# Altium PCB 控制板PCB.PcbDoc
Units mil, origin at the board's own origin, x right, y up, seen from the top; angles counter-clockwise.
Board outline 3952.04 x 3955.04 mil, 2 copper layers (Top Layer, Bottom Layer); 17 components, 47 nets, 230 pads, 243 vias.
Unrouted connection lines stored in the file: 41.
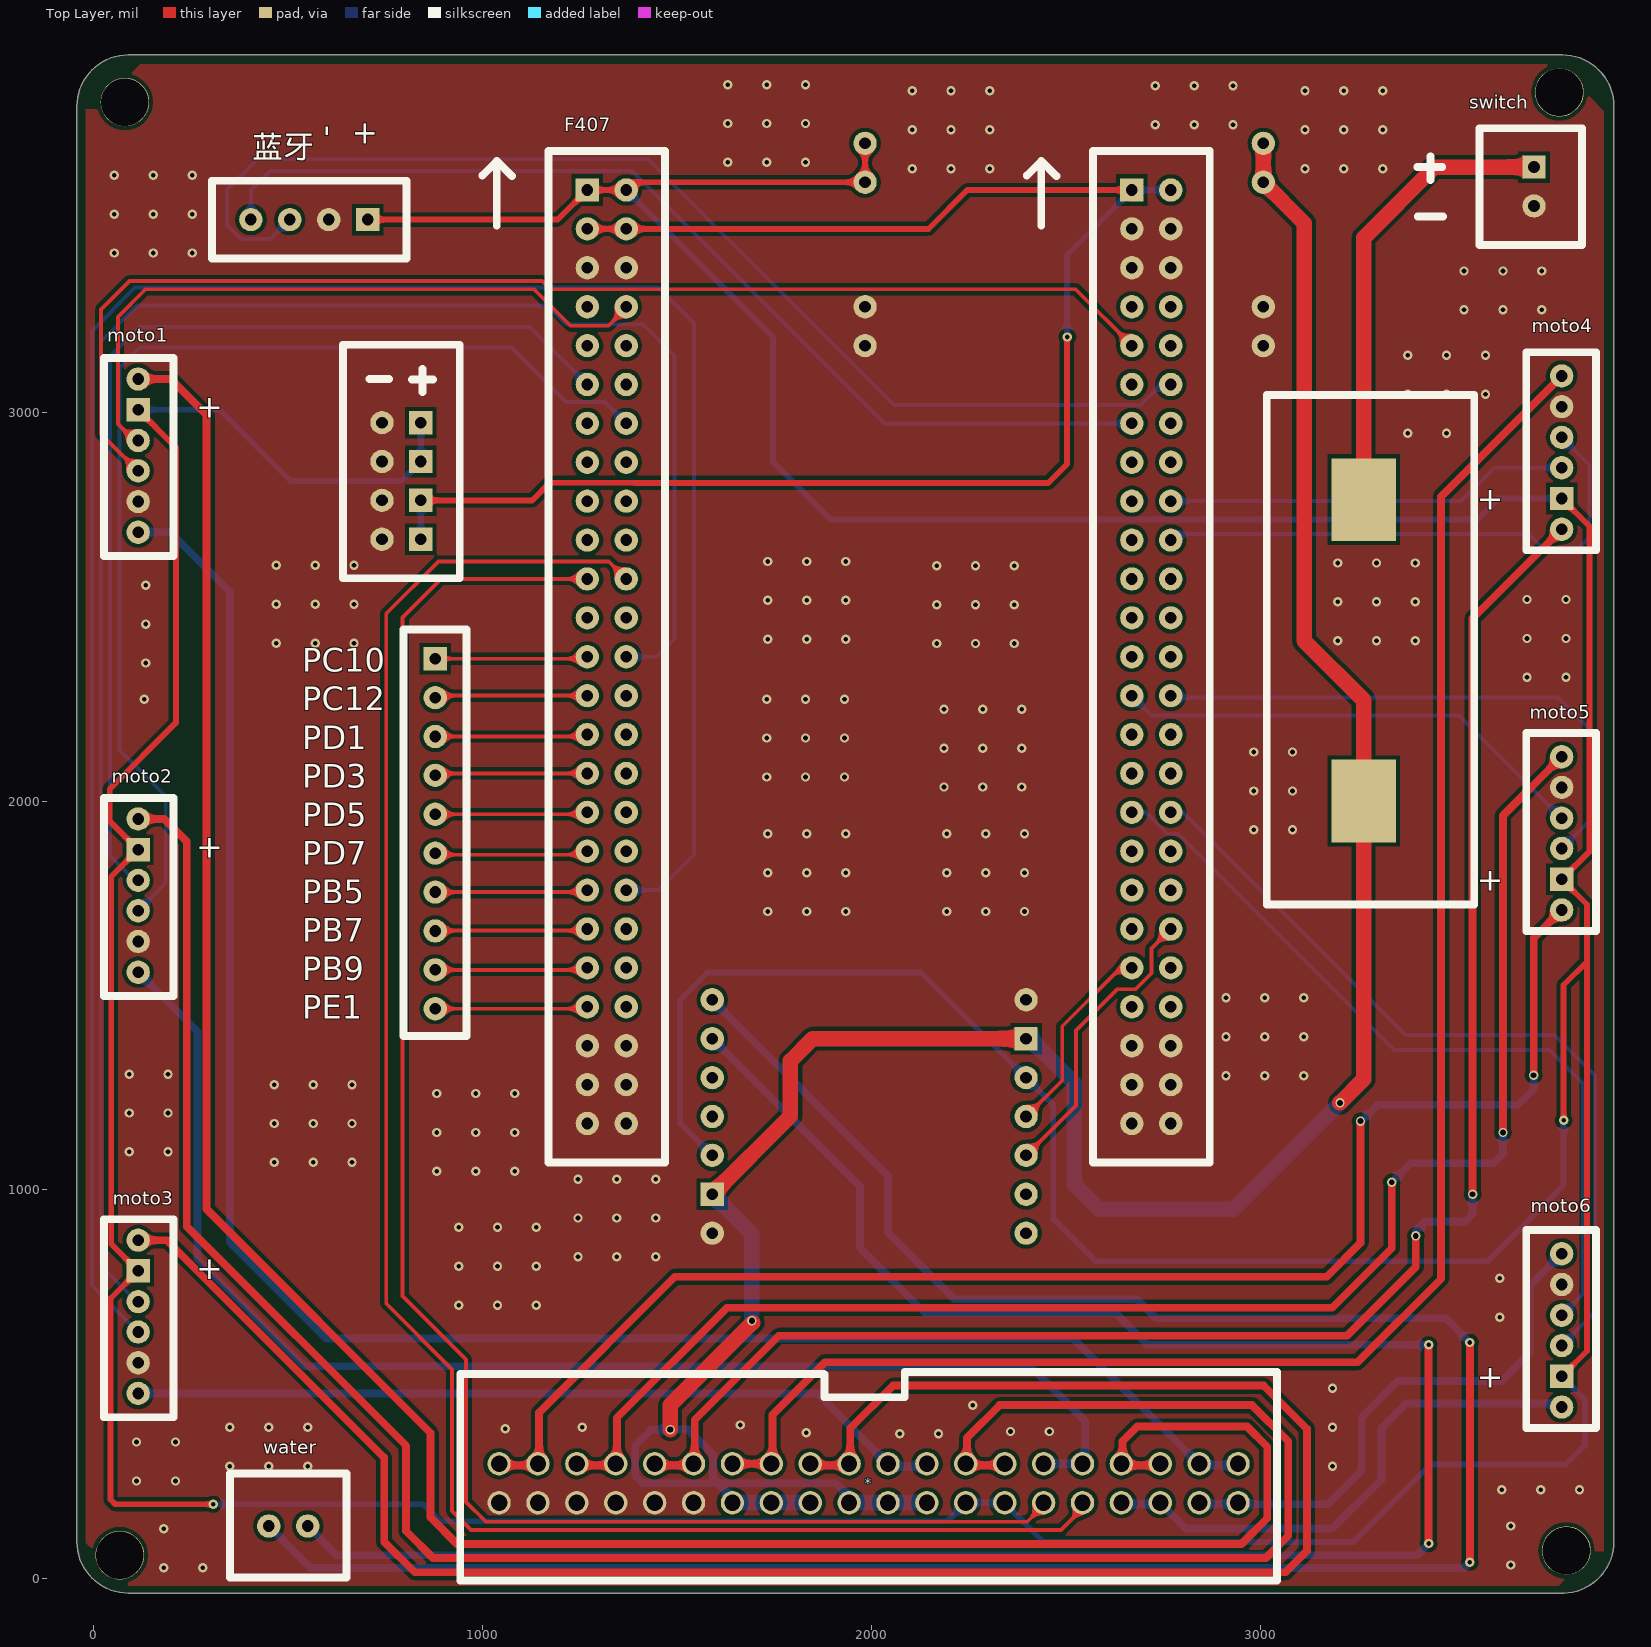
[diagram p0: Top Layer view]
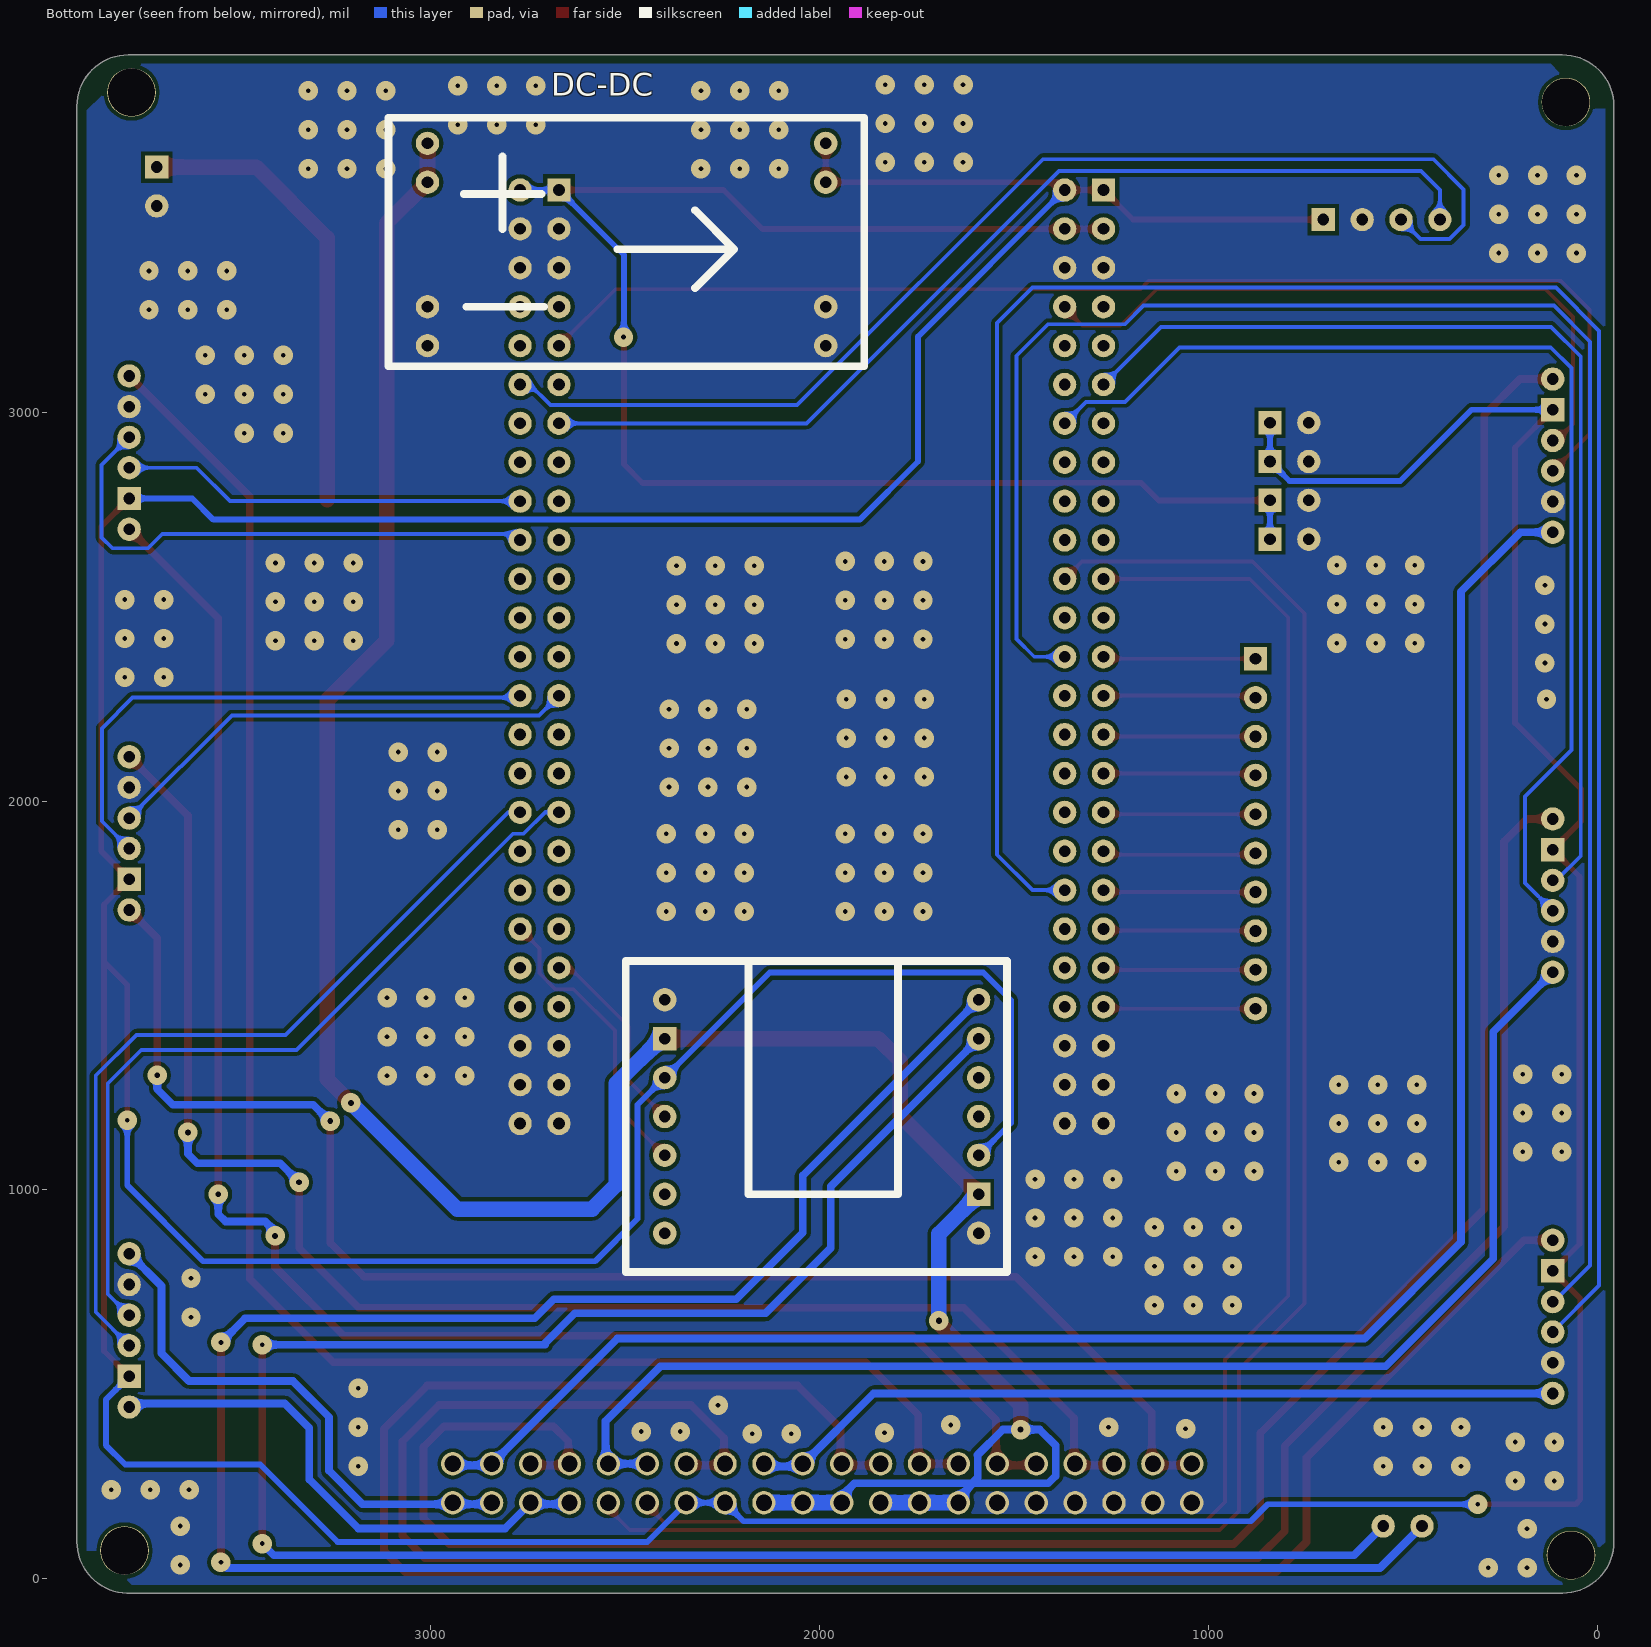
[diagram p1: Bottom Layer view, seen from below]

## Layer stack, top to bottom
Top Solder: solder mask 0.4, Solder Resist, Dk 3.5
Top Layer: signal copper 1.4
Dielectric 1: dielectric 12.6, FR-4, Dk 4.8
Bottom Layer: signal copper 1.4
Bottom Solder: solder mask 0.4, Solder Resist, Dk 3.5

## Board outline
89.24,-36.52 cw(c89.31,96) -43.21,96 cw(c-35.69,96) -43.21,96.04 -43.21,3786 cw(c-35.69,3786) -43.21,3786.06 ccw(c89.31,3786) -43.21,3786 -43.21,3786.06 cw(c89.31,3786) 89.31,3918.52 cw(c89.31,3911) 89.38,3918.51 3775.97,3918.51 cw(c3776.31,3911.01) 3776.31,3918.52 cw(c3776.31,3786.01) 3908.82,3786.34 cw(c3901.31,3786.01) 3908.83,3786.01 3908.83,96 cw(c3776.31,96) 3780.24,-36.46 cw(c3779.31,-29) 3779.31,-36.52 89.31,-36.52 cw(c89.31,-29)

## Design rules (kind name [scope] priority, off if disabled: settings)
Clearance [All] p1: gap=10 ignorepadtopadclearanceinfootprint=FALSE except(0: Arc-Hole Track-Hole SMDPad-Hole THPad-Hole Via-Hole Fill-Hole Poly-Hole Region-Hole Text-Hole; 3: Via-Via; 5: Arc-Arc Arc-Track Track-Track)
HoleSize [All] p1: absolutevalues=TRUE maxlimit=150 minlimit=1 maxpercent=80.000 minpercent=20.000
PolygonConnect PolygonConnect_1 [All] p1: thpad.connectstyle=Direct thpad.reliefconductorwidth=10 thpad.reliefentries=4 thpad.polygonreliefangle="90 Angle" thpad.airgapwidth=10 smdpad.connectstyle=Relief smdpad.reliefconductorwidth=10 smdpad.reliefentries=4 smdpad.polygonreliefangle="90 Angle" smdpad.airgapwidth=10 via.connectstyle=Relief via.reliefconductorwidth=10 via.reliefentries=4 via.polygonreliefangle="90 Angle" via.airgapwidth=10
PolygonConnect [All] p2: connectstyle=Direct reliefconductorwidth=10 reliefentries=4 polygonreliefangle="90 Angle" airgapwidth=10
RoutingVias [All] p1: holewidth=28 width=50 viastyle="Through Hole" minholewidth=28 minwidth=50 maxholewidth=28 maxwidth=50
SolderMaskExpansion [All] p1: expansion=4
Width Width_2 [InNet('12V')] p1: maxlimit=40 minlimit=20 preferedwidth=20
Width Width_1 [InNet('5V')] p2: maxlimit=40 minlimit=15 preferedwidth=15
Width [All] p3: maxlimit=40 minlimit=10 preferedwidth=10
29 further rules are at their usual default settings.

## Classes and differential pairs
component class 控制板原理图: *1 *2 *3 *4 *5 *6 *7 *8 *9 *10 *11 *13 *14 *15 *17

## Components (designator, comment, footprint, x,y, rotation, side; value= is the part's Value field where it differs from the comment)
* "40P" PCBComponent_1 2842.31,296 r270 top
*1 "PIN_HEADER" PIN_HEADER -9427.69,-17026 r0 top
*2 "POWER_HEADER" POWER_HEADER 841.31,3073 r0 top
*13 "STM32F407右" STM32F407左 2669.31,2471 r0 top locked
*17 "A4950" A4950 2017.31,944 r180 bottom
DC-DC "DC-DC" DC-DC 2376.31,3597 r180 bottom (schematic designator *15)
F407 "STM32F407左" STM32F407左 1269.31,2471 r0 top locked (schematic designator *14)
moto1 "ENCODER1" ENCODER1 114.31,3085 r180 top (schematic designator *8)
moto2 "ENCODER2" ENCODER1 114.31,1954 r180 top (schematic designator *9)
moto3 "ENCODER3" ENCODER1 114.31,871 r180 top (schematic designator *10)
moto4 "ENCODER4" ENCODER2 3753.31,3101 r180 top (schematic designator *5)
moto5 "ENCODER5" ENCODER2 3753.31,2122 r180 top (schematic designator *6)
moto6 "ENCODER6" ENCODER2 3753.31,844 r180 top (schematic designator *7)
switch "POWER" POWER 3703.31,3530 r0 top (schematic designator *11)
water "WATER_MOTER" WATER_HEADER 550.31,136 r90 top (schematic designator *3)
蓝牙 "HC-06" HC-06 411.31,3687 r270 top (schematic designator *12)
? "SWITCH" switch 3265.31,2775 r270 top

## Footprints (in the part's own frame and the unit in brackets; to place one, negate y for a bottom-side part, rotate by r counter-clockwise, add the part's x,y. Pads: shape width x height; smd on the part's side, far side on the other; paste and mask are expansions set on the pad)
A4950 [mil]
  round 60 hole 30: 1(-380,545) 3(-380,345) 4(-380,245) 5(-380,145) 6(-380,45) 7(-380,-55) 8(427,545) 9(427,445) 10(427,345) 11(427,245) 12(427,145) 14(427,-55)
  rect 60x60 hole 30: 2(-380,445) 13(427,45)
  silkscreen extent -480,-155 500,645
DC-DC [mil]
  round 60 hole 30: 1(-631,-426) 2(-631,-326) 3(-631,-6) 4(-631,94) 5(393,-426) 6(393,-326) 7(393,-6) 8(393,94)
  silkscreen extent -731,-479 492,160
ENCODER1 [mil]
  round 60 hole 30: 1(0,394) 2(0,315) 3(0,236) 4(0,158) 6(0,0)
  rect 60x60 hole 30: 5(0,79)
  silkscreen extent -91,-54 88,455
ENCODER2 [mil]
  round 60 hole 30: 1(-21,8) 2(-21,87) 3(-21,166) 4(-21,244) 6(-21,402)
  rect 60x60 hole 30: 5(-21,323)
  silkscreen extent -109,-53 70,456
HC-06 [mil]
  round 60 hole 30: 1(192,-7) 2(192,93) 3(192,193)
  rect 60x60 hole 30: 4(192,293)
  silkscreen extent 92,-107 292,393
PCBComponent_1 [mil]
  round 60 hole 41.73: 1(0,100) 2(0,0) 3(0,-100) 4(0,-200) 5(0,-300) 6(0,-400) 7(0,-500) 8(0,-600) 9(0,-700) 10(0,-800) 11(0,-900) 12(0,-1000) 13(0,-1100) 14(0,-1200) 15(0,-1300) 16(0,-1400) 17(0,-1500) 18(0,-1600) 19(0,-1700) 21(100,100) 22(100,0) 23(100,-100) 24(100,-200) 25(100,-300) 26(100,-400) 27(100,-500) 28(100,-600) 29(100,-700) 30(100,-800) 31(100,-900) 32(100,-1000) 33(100,-1100) 34(100,-1200) 35(100,-1300) 36(100,-1400) 37(100,-1500) 38(100,-1600) 39(100,-1700)
  round 60 hole 42.52: 20(0,-1800) 40(100,-1800)
  silkscreen extent -236,-1900 300,200
PIN_HEADER [mil]
  rect 60x60 hole 30: 1(10306,19392)
  round 60 hole 30: 2(10306,19292) 3(10306,19192) 4(10306,19092) 5(10306,18992) 6(10306,18892) 7(10306,18792) 8(10306,18692) 9(10306,18592) 10(10306,18492)
  silkscreen extent 10224,18422 10386,19467
POWER [mil]
  rect 60x60 hole 30: 1(0,100)
  round 60 hole 30: 2(0,0)
  silkscreen extent -300,-100 123,200
POWER_HEADER [mil]
  rect 60x60 hole 30: 1(0,-100) 2(0,-200) 3(0,-300) 4(0,-400)
  round 60 hole 30: 5(-100,-100) 6(-100,-200) 7(-100,-300) 8(-100,-400)
  silkscreen extent -200,-500 100,100
STM32F407左 [mil]
  rect 60x60 hole 30: 1(0,1100)
  round 60 hole 30: 2(0,1000) 3(0,900) 4(0,800) 5(0,700) 6(0,600) 7(0,500) 8(0,400) 9(0,300) 10(0,200) 11(0,100) 12(0,0) 13(0,-100) 14(0,-200) 15(0,-300) 16(0,-400) 17(0,-500) 18(0,-600) 19(0,-700) 20(0,-800) 21(0,-900) 22(0,-1000) 23(100,1100) 24(100,1000) 25(100,900) 26(100,800) 27(100,700) 28(100,600) 29(100,500) 30(100,400) 31(100,300) 32(100,200) 33(100,100) 34(100,0) 35(100,-100) 36(100,-200) 37(100,-300) 38(100,-400) 39(100,-500) 40(100,-600) 41(100,-700) 42(100,-800) 43(100,-900) 44(100,-1000) 45(0,-1100) 46(0,-1200) 47(0,-1300) 48(100,-1100) 49(100,-1200) 50(100,-1300)
  silkscreen extent -270,-1400 200,1200
switch [mm]
  rect 5.4x4.2 smd: 1(0,0) 2(19.685,0)
  silkscreen extent -6.83,-6.32 26.44,7.21
WATER_HEADER [mil]
  round 60 hole 30: 1(0,100) 2(0,0)
  silkscreen extent -132,-100 135,200

## Free pads (board coordinates)
  round 125 hole 122: 2(67.31,61) 2(80.31,3797) 2(3768.31,3822) 2(3786.31,73)

## Via types
v1: diameter 24/50 (per signal layer), hole 12, Top Layer to Bottom Layer, 234 vias
v2: diameter 24/50 (per signal layer), hole 15, Top Layer to Bottom Layer, 6 vias
v3: diameter 24/50 (per signal layer), hole 16, Top Layer to Bottom Layer, 3 vias

## Nets (pads, with @x,y where several pads share a name; then routed paths per layer and width w, separated by ;. In a path a pad name is that pad's centre, name@x,y a point inside that pad or via, vN(x,y) a via of type N, cw(c..) or ccw(c..) an arc to the next point about the centre after c; other vN are vias at no path point)
3V3: *2.3 *2.4 *13.1 *13.23 F407.2 F407.24 | length 4117.9
  Top Layer w15: *2.3 1127.31,2773 1172.81,2818.5 1388.98,2818.5 1389.48,2818 2454.31,2818 2502.31,2866 v1@2502.31,3195 ; F407.2 F407.24 2146.31,3471 2246.31,3571 *13.1
  Bottom Layer w15: *2.4 *2.3 ; v1(2503.31,3193) 2502.31,3194 2502.31,3404 *13.1 *13.23
5V: *2.1 *2.2 *17.3 *17.12 *.27 *.28 DC-DC.7 DC-DC.8 F407.1 F407.23 moto1.5 moto2.5 moto3.5 moto4.5 moto5.5 moto6.5 蓝牙.4 | length 18780.9
  Top Layer w15: moto1.5 211.31,2909 211.31,2201 41.31,2031 41.31,1948 moto2.5 45.31,1806 45.31,861 moto3.5 43.31,721 43.31,204 55.31,192 v1(307.31,192) ; 蓝牙.4 1193.31,3495 F407.1 F407.23 1389.31,3591 DC-DC.7 1983.31,3690 1982.31,3691 DC-DC.8 ; moto6.5 3839.31,586 3839.31,1587 ; moto4.5 3846.31,2706 3846.31,1871 moto5.5 3839.31,1734 3839.31,1587 ; v1(3779.31,1179) 3779.31,1527 3839.31,1587
  Bottom Layer w15: moto1.5 323.31,3006 506.31,2823 791.31,2823 *2.2 *2.1 ; v1(307.31,192) 847.31,192 890.81,148.5 2194.81,148.5 *.28 *.27 ; F407.23 1746.31,3194 1746.31,2873 1895.81,2723.5 2688.98,2723.5 2689.48,2724 2749.13,2724 2749.63,2723.5 3557.81,2723.5 3612.31,2778 moto4.5 ; *17.12 1507.31,1172 1507.31,1488 1578.31,1559 2127.31,1559 *17.3 2467.31,1219 2467.31,926 2576.31,817 3584.31,817 3779.31,1012 v1(3779.31,1179) ; *.27@2345.31,192 2442.31,95 3238.31,95 3437.31,294 3784.31,294 3834.31,344 3834.31,461 moto6.5
12V: *17.2 *17.13 *.29 *.30 *.31 *.32 *.33 *.34 ?.2 DC-DC.3 DC-DC.4 | length 7093.1
  Top Layer w40: v3(1482.31,384) 1482.31,447 v3@1694.31,659 ; *17.13 1791.31,1190 1791.31,1332 1848.31,1389 *17.2 ; DC-DC.4 DC-DC.3 3112.31,3486 3112.31,2412 3265.31,2259 ?.2 3265.31,1285 v3(3204.31,1224)
  Bottom Layer w20: *.34 1642.31,208 1604.31,246 1411.31,246 1392.31,265 1392.31,343 1433.31,384 v3(1482.31,384) 1528.02,384 1593.31,318.71 1592.31,317.71 1592.31,261 1607.31,246 1909.31,246 1942.31,213 *.31 ; *17.2 *17.2@2407.31,1389
  Bottom Layer w40: *17.13 1692.31,887 v3(1692.31,664) ; *.34 *.33 *.32 ; *.31 *.30 *.29 ; *17.2@2407.31,1389 2521.31,1275 2521.31,1014 2584.31,951 2931.31,951 v3(3204.31,1224)
12V_IN: ?.1 switch.1 | length 1186.4
  Top Layer w40: ?.1 3265.31,3448 3447.31,3630 switch.1
401R: *.25 F407.33 | length 4744.5
  Top Layer w10: F407.33 1324.31,2616 886.31,2616 752.31,2482 752.31,708 921.31,539 921.31,175 970.31,126 2487.31,126 2545.31,184 *.25@2545.31,192
401T: *.26 F407.11 | length 4385.3
  Top Layer w10: F407.11 893.31,2571 794.31,2472 794.31,727 957.31,564 957.31,198 1008.31,147 2400.31,147 *.26@2445.31,192
EN1A: F407.26 moto1.4 | length 1742.8
  Top Layer w10: moto1.4 104.31,2927 62.31,2969 62.31,3245 133.31,3316 1132.31,3316 1226.31,3222 1323.31,3222 1369.31,3268 F407.26
EN1B: *13.5 moto1.3 | length 3203.3
  Top Layer w10: moto1.3 19.31,2944 19.31,3264 92.31,3337 1153.31,3337 1174.31,3316 2524.31,3316 *13.5
EN2A: F407.6 moto2.4 | length 2701.6
  Bottom Layer w10: moto2.4@113.81,1795.5 105.81,1795.5 42.31,1859 42.31,3143 118.31,3219 1121.31,3219 F407.6
EN2B: F407.29 moto2.3 | length 2879.4
  Bottom Layer w10: moto2.3 185.31,1789 185.31,2012 66.31,2131 66.31,3113 119.31,3166 1074.31,3166 1214.31,3026 1314.31,3026 F407.29
EN3A: F407.35 moto3.4 | length 4914.8
  Bottom Layer w10: 90.31,734 18.3,806 18.31,3181 111.31,3274 1166.31,3274 1214.31,3226 1412.31,3226 1493.31,3145 1493.31,2417 1447.31,2371 F407.35
EN3B: F407.41 moto3.3 | length 5833.7
  Bottom Layer w10: moto3.3 -4.69,754 -4.69,3209 106.31,3320 1452.31,3320 1543.31,3229 1543.31,1862 1452.31,1771 F407.41
EN4A: *13.31 moto4.4 | length 1015
  Bottom Layer w10: *13.31 3515.31,2771 3601.31,2857 moto4.4@3748.67,2857
EN4B: *13.32 moto4.3 | length 1396
  Bottom Layer w10: *13.32 2785.31,2687 3689.31,2687 3726.31,2650 3817.31,2650 3845.31,2678 3845.31,2864 moto4.3
EN5A: *13.36 moto5.4 | length 1457.8
  Bottom Layer w10: *13.36 2764.31,2266 3765.31,2266 3844.31,2187 3844.31,1948 moto5.4
EN5B: *13.14 moto5.3 | length 1235.5
  Bottom Layer w10: *13.14 2720.31,2220 3510.31,2220 moto5.3
EN6A: *13.39 moto6.4 | length 2101
  Bottom Layer w10: *13.39 2800.31,1971 3372.31,1399 3755.31,1399 3860.31,1294 3860.31,686 moto6.4
EN6B: *13.17 moto6.3 | length 2067.5
  Bottom Layer w10: *13.17 2705.31,1971 2760.31,1916 2787.95,1916 3343.95,1360 3743.31,1360 3829.31,1274 3829.31,733 moto6.3
GND: *2.5 *2.6 *2.7 *2.8 *13.2 *13.3 *13.24 *13.25 *13.45 *13.46 *13.47 *13.48 *13.49 *13.50 *17.1 *17.14 *.35 *.36 *.37 *.38 *.39 *.40 DC-DC.1 DC-DC.2 DC-DC.5 DC-DC.6 F407.3 F407.25 F407.45 F407.46 F407.47 F407.48 F407.49 F407.50 moto1.2 moto2.2 moto3.2 moto4.2 moto5.2 moto6.2 switch.2 蓝牙.3
  other v1: 180.31,29 280.31,29 3643.31,36 180.31,129 3643.31,136 3620.31,229 3720.31,229 3820.31,229 110.31,252 210.31,252 350.31,290 450.31,290 550.31,290 3185.31,290 110.31,352 210.31,352 2072.31,373 2172.31,373 1832.31,376 2357.31,379 2457.31,379 1058.31,386 350.31,390 450.31,390 550.31,390 1256.31,390 3185.31,390 1662.31,396 2260.31,447 3185.31,490 3615.31,673 938.31,704 1038.31,704 1138.31,704 3615.31,773 938.31,804 1038.31,804 1138.31,804 1245.31,828 1345.31,828 1445.31,828 938.31,904 1038.31,904 1138.31,904 1245.31,928 1345.31,928 1445.31,928 1245.31,1028 1345.31,1028 1445.31,1028 882.31,1048 982.31,1048 1082.31,1048 464.31,1071 564.31,1071 664.31,1071 91.31,1098 191.31,1098 882.31,1148 982.31,1148 1082.31,1148 464.31,1171 564.31,1171 664.31,1171 91.31,1198 191.31,1198 882.31,1248 982.31,1248 1082.31,1248 464.31,1271 564.31,1271 664.31,1271 2911.31,1294 3011.31,1294 3111.31,1294 91.31,1298 191.31,1298 2911.31,1394 3011.31,1394 3111.31,1394 2911.31,1494 3011.31,1494 3111.31,1494 1733.31,1716 1833.31,1716 1933.31,1716 2193.31,1716 2293.31,1716 2393.31,1716 1733.31,1816 1833.31,1816 1933.31,1816 2193.31,1816 2293.31,1816 2393.31,1816 1733.31,1916 1833.31,1916 1933.31,1916 2193.31,1916 2293.31,1916 2393.31,1916 2982.31,1926 3082.31,1926 2982.31,2026 3082.31,2026 2186.31,2036 2286.31,2036 2386.31,2036 1730.31,2062 1830.31,2062 1930.31,2062 2982.31,2126 3082.31,2126 2186.31,2136 2286.31,2136 2386.31,2136 1730.31,2162 1830.31,2162 1930.31,2162 2186.31,2236 2286.31,2236 2386.31,2236 130.31,2262 1730.31,2262 1830.31,2262 1930.31,2262 3685.31,2318 3785.31,2318 134.31,2355 2167.31,2405 2267.31,2405 2367.31,2405 469.31,2406 569.31,2406 669.31,2406 3198.31,2412 3298.31,2412 3398.31,2412 1733.31,2416 1833.31,2416 1933.31,2416 3685.31,2418 3785.31,2418 134.31,2455 2167.31,2505 2267.31,2505 2367.31,2505 469.31,2506 569.31,2506 669.31,2506 3198.31,2512 3298.31,2512 3398.31,2512 1733.31,2516 1833.31,2516 1933.31,2516 3685.31,2518 3785.31,2518 134.31,2555 2167.31,2605 2267.31,2605 2367.31,2605 469.31,2606 569.31,2606 669.31,2606 3198.31,2612 3298.31,2612 3398.31,2612 1733.31,2616 1833.31,2616 1933.31,2616 3378.31,2946 3478.31,2946 3378.31,3046 3478.31,3046 3578.31,3046 3378.31,3146 3478.31,3146 3578.31,3146 3523.31,3263 3623.31,3263 3723.31,3263 3523.31,3363 3623.31,3363 3723.31,3363 53.31,3409 153.31,3409 253.31,3409 53.31,3509 153.31,3509 253.31,3509 53.31,3609 153.31,3609 253.31,3609 2104.31,3626 2204.31,3626 2304.31,3626 3114.31,3626 3214.31,3626 3314.31,3626 1630.31,3642 1730.31,3642 1830.31,3642 2104.31,3726 2204.31,3726 2304.31,3726 3114.31,3726 3214.31,3726 3314.31,3726 2729.31,3739 2829.31,3739 2929.31,3739 1630.31,3742 1730.31,3742 1830.31,3742 2104.31,3826 2204.31,3826 2304.31,3826 3114.31,3826 3214.31,3826 3314.31,3826 2729.31,3839 2829.31,3839 2929.31,3839 1630.31,3842 1730.31,3842 1830.31,3842
H1: *1.1 F407.13 | length 393.1
  Top Layer w10: *1.1 1264.31,2366 F407.13
H2: *1.2 F407.14 | length 393.1
  Top Layer w10: *1.2 883.31,2271 F407.14
H3: *1.3 F407.15 | length 393.1
  Top Layer w10: *1.3 1264.31,2166 F407.15
H4: *1.4 F407.16 | length 393.1
  Top Layer w10: *1.4 883.31,2071 F407.16
H5: *1.5 F407.17 | length 386
  Top Layer w10: *1.5@893.31,1966 F407.17@1279.31,1966
H6: *1.6 F407.18 | length 393.1
  Top Layer w10: *1.6@883.31,1862 F407.18@1269.31,1862 ; F407.18@1264.31,1876 F407.18
H7: *1.7 F407.19 | length 386
  Top Layer w10: *1.7@880.31,1766 F407.19@1266.31,1766
H8: *1.8 F407.20 | length 386
  Top Layer w10: *1.8@884.31,1667 F407.20@1270.31,1667
H9: *1.9 F407.21 | length 393.1
  Top Layer w10: *1.9 1264.31,1566 F407.21
H10: *1.10 F407.22 | length 393.1
  Top Layer w10: *1.10 1264.31,1466 F407.22
HR: *13.7 蓝牙.1 | length 2630.1
  Bottom Layer w10: 蓝牙.1 404.31,3571 453.31,3620 1383.94,3620 2032.94,2971 *13.7
HT: *13.28 蓝牙.2 | length 3029.7
  Bottom Layer w10: 蓝牙.2 454.31,3445 379.31,3445 343.31,3481 343.31,3572 421.31,3650 1425.31,3650 2057.31,3018 2691.31,3018 2744.31,3071 2757.31,3071 *13.28
MO11: *.1 *.2 moto1.1 | length 4804.1
  Bottom Layer w20: moto1.1 197.31,2691 350.31,2538 350.31,866 598.31,618 2519.31,618 2845.31,292 *.1@2945.31,292
MO12: *.3 *.4 moto1.6 | length 6249.5
  Top Layer w20: moto1.6 198.31,3085 290.31,2993 290.31,951 866.31,375 866.31,158 934.31,90 2951.31,90 3017.31,156 3017.31,340 2965.31,392 2683.31,392 2645.31,354 2645.31,292 *.3@2745.31,292
MO21: *.5 *.6 moto2.1 | length 3494.7
  Top Layer w20: moto2.1 moto2.1@119.31,1555
  Bottom Layer w20: moto2.1 267.31,1407 267.31,823 543.31,547 2408.31,547 2549.31,406 2549.31,289 *.5@2541.31,281 ; *.6 2539.31,296 2542.31,299 *.5
MO22: *.7 *.8 moto2.6 | length 5789.1
  Top Layer w20: moto2.6 181.31,1954 239.31,1896 239.31,906 803.31,342 803.31,123 872.31,54 3014.31,54 3071.31,111 3071.31,354 2978.31,447 2329.31,447 2245.31,363 2245.31,292 *.7@2345.31,292
MO31: *.9 *.10 moto3.1 | length 2108.2
  Bottom Layer w20: moto3.1 1860.31,477 2048.31,289 2133.31,289 *.9@2141.31,281
MO32: *.11 *.12 moto3.6 | length 5283.2
  Top Layer w20: moto3.6 188.31,871 747.31,312 747.31,95 825.31,17 3064.31,17 3119.31,72 3119.31,386 3008.31,497 2055.31,497 1945.31,387 1945.31,292 *.12@1845.31,292
MO41: *.13 *.14 moto4.1 | length 4543.4
  Top Layer w20: *.14 *.13 ; *.13@1745.31,292 1745.31,422 1880.31,557 3249.31,557 3464.31,772 3464.31,2783 moto4.1
MO42: *.15 *.16 moto4.6 | length 4343.9
  Top Layer w20: *.16@1445.31,292 1545.31,292 1545.31,409 1761.31,625 3222.31,625 3399.31,802 v2(3399.31,882) ; v2(3545.31,989) 3545.31,1034 ; 3545.31,1036 3545.31,2470 moto4.6
  Bottom Layer w20: v2(3399.31,882) 3399.31,894 3424.31,919 3526.31,919 3545.31,938 v2(3545.31,989)
MO51: *.17 *.18 moto5.1 | length 3964.4
  Top Layer w20: *.18@1245.31,292 1345.31,292 1345.31,414 1628.31,697 3184.31,697 3337.31,850 v2(3337.31,1020) ; v2(3623.31,1148) 3623.31,1963 moto5.1
  Bottom Layer w20: v2(3337.31,1020) 3386.31,1069 3599.31,1069 3623.31,1093 v2(3623.31,1148)
MO52: *.19 *.20 moto5.6 | length 3811.4
  Top Layer w20: *.20@1045.31,292 1145.31,292 1145.31,428 1494.31,777 3170.31,777 3257.31,864 v2(3257.31,1177) ; v2(3702.31,1295) 3702.31,1648 moto5.6
  Bottom Layer w20: v2(3257.31,1177) 3259.31,1177 3301.31,1219 3662.31,1219 3702.31,1259 v2(3702.31,1295)
MO61: *.21 *.22 moto6.1 | length 1394.9
  Bottom Layer w20: *.22@2845.31,192 2945.31,192 3174.31,192 3260.31,278 3260.31,416 3353.31,509 3620.31,509 3691.31,580 3691.31,753 moto6.1 moto6.1@3757.31,836
MO62: *.23 *.24 moto6.6 | length 1368.7
  Bottom Layer w20: *.24@2645.31,192 2745.31,192 2807.31,130 3185.31,130 3311.31,256 3311.31,388 3374.31,451 3765.31,451 moto6.6
WATER1: *13.21 *17.4 | length 511.7
  Top Layer w10: *17.4 2490.31,1282 2490.31,1421 2640.31,1571 *13.21
WATER2: *13.42 *17.5 | length 763.4
  Top Layer w10: *17.5 2525.31,1217 2525.31,1410 2631.31,1516 2677.95,1516 2719.31,1557.36 2719.31,1621 *13.42
WATERO1: *17.8 water.1 | length 6103
  Top Layer w20: v1(3538.31,43) v1(3538.31,608)
  Bottom Layer w20: water.1 558.31,28 3523.31,28 v1(3538.31,43) ; *17.8 2042.31,1037 2042.31,890 2213.31,719 2682.31,719 2731.31,670 3476.31,670 v1(3538.31,608)
WATERO2: *17.9 water.2 | length 5699.4
  Top Layer w20: v1(3432.31,91) v1(3432.31,602)
  Bottom Layer w15: 2705.31,602 2705.31,606
  Bottom Layer w20: water.2 625.31,61 3402.31,61 v1(3432.31,91) ; *17.9 1970.31,1009 1970.31,851 2138.31,683 2628.31,683 2705.31,606 ; 2705.31,602 v1(3432.31,602)
pads on no net: *13.4 *13.6 *13.8 *13.9 *13.10 *13.11 *13.12 *13.13 *13.15 *13.16 *13.18 *13.19 *13.20 *13.22 *13.26 *13.27 *13.29 *13.30 *13.33 *13.34 *13.35 *13.37 *13.38 *13.40 *13.41 *13.43 *13.44 *17.6 *17.7 *17.10 *17.11 F407.4 F407.5 F407.7 F407.8 F407.9 F407.10 F407.12 F407.27 F407.28 F407.30 F407.31 F407.32 F407.34 F407.36 F407.37 F407.38 F407.39 F407.40 F407.42 F407.43 F407.44

## Polygon pours and split planes (outlines as drawn)
GND on Top Layer "Top Layer-GND" (solid, remove dead copper, pour order 8): 119.31,3894 3762.31,3894 3882.31,3774 3882.31,71 3855.31,71 3767.31,-17 86.31,-17 86.31,-14 -20.69,93 -20.69,3779 4.31,3779
no net on Top Layer "Top Layer-No Net" (solid, pour order 2): 110.31,3885
no net on Top Layer "Top Layer-No Net 1" (solid, pour order 0): 168.31,3870
GND on Bottom Layer "Bottom Layer-GND" (solid, remove dead copper, pour order 10): 119.85,3895.57 3762.85,3895.57 3882.85,3775.57 3882.85,72.58 3855.85,72.58 3767.85,-15.43 86.85,-15.43 86.85,-12.43 -20.15,94.58 -20.15,3780.57 4.85,3780.57

## Silkscreen, mask and mechanical layers (free items; w line width, h text height)
Mechanical 1:
  lines w15: -35.69,96 ccw(c89.31,96) 89.31,-29 ; -35.69,3786 cw(c89.31,3786) 89.31,3911 ; 3776.31,-29 ccw(c3776.31,96) 3901.31,96 ; 3776.31,3911.01 cw(c3776.31,3786.01) 3901.31,3786.01
  lines w20: -35.69,96 -35.69,3786 ; 89.31,-29 3779.31,-29 ; 89.31,3911 3776.31,3911 ; 3901.31,96 3901.31,3786.01

## Text inside footprints (layer, text, board x,y; h text height)
*1: Top Overlay "PB7" at 536.31,1638.22 h60; Top Overlay "PE1" at 536.31,1440 h60; Top Overlay "PB9" at 536.31,1539.11 h60; Top Overlay "PB5" at 536.31,1737.33 h60; Top Overlay "PD7" at 536.31,1836.44 h60; Top Overlay "PD5" at 536.31,1935.56 h60; Top Overlay "PD3" at 536.31,2034.67 h60; Top Overlay "PD1" at 536.31,2133.78 h60; Top Overlay "PC12" at 536.31,2232.89 h60; Top Overlay "PC10" at 536.31,2332 h60
moto1: Top Overlay "+" at 263.31,3035 h60 r180
moto2: Top Overlay "+" at 263.31,1904 h60 r180
moto3: Top Overlay "+" at 263.31,821 h60 r180
moto4: Top Overlay "+" at 3625.31,2749 h60
moto5: Top Overlay "+" at 3625.31,1770 h60
moto6: Top Overlay "+" at 3625.31,492 h60
蓝牙: Top Overlay "+" at 672.31,3750 h60 r270; Top Overlay "-" at 577.31,3738 h60 r270